# EAGLE board RCSfullschematic3 (EAGLE 7.5.0)
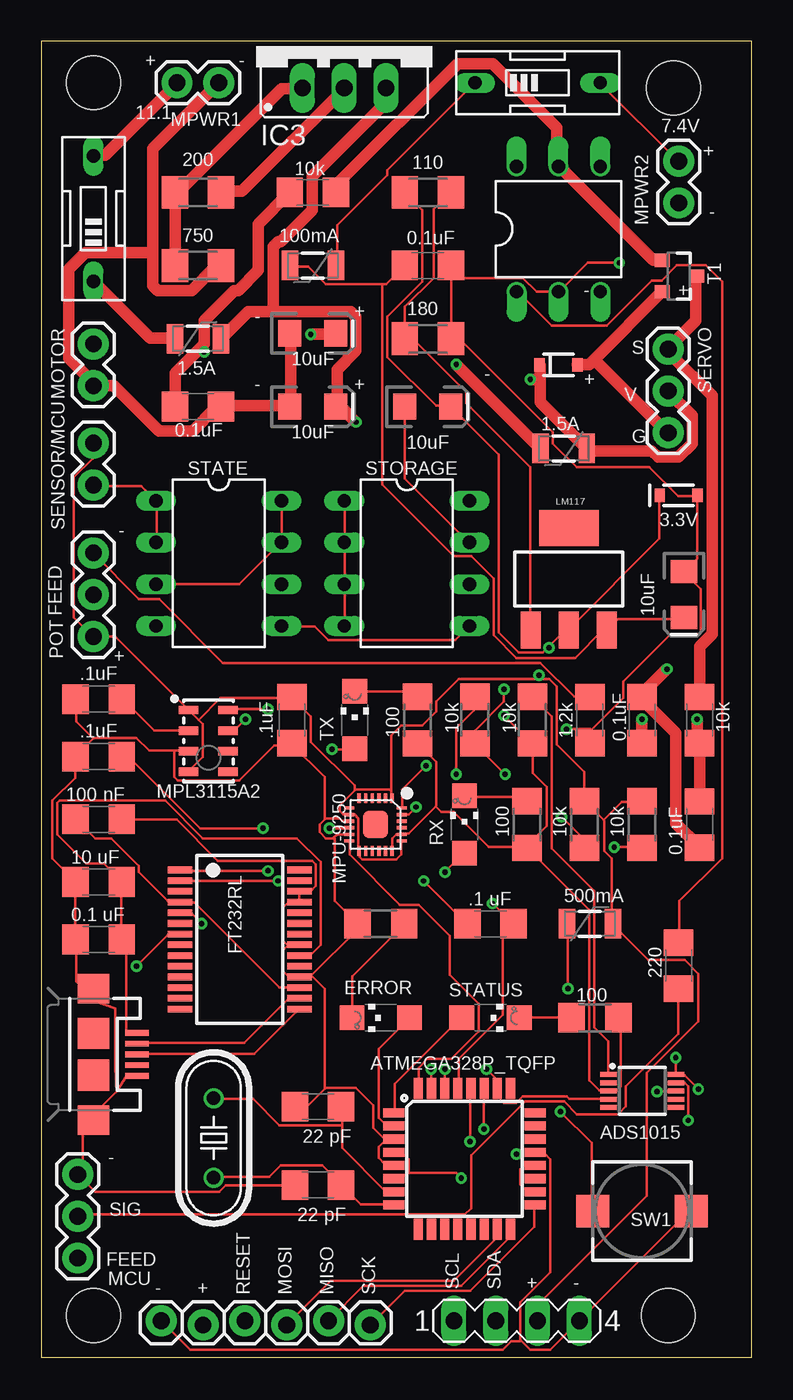
[diagram p0: board, top side]
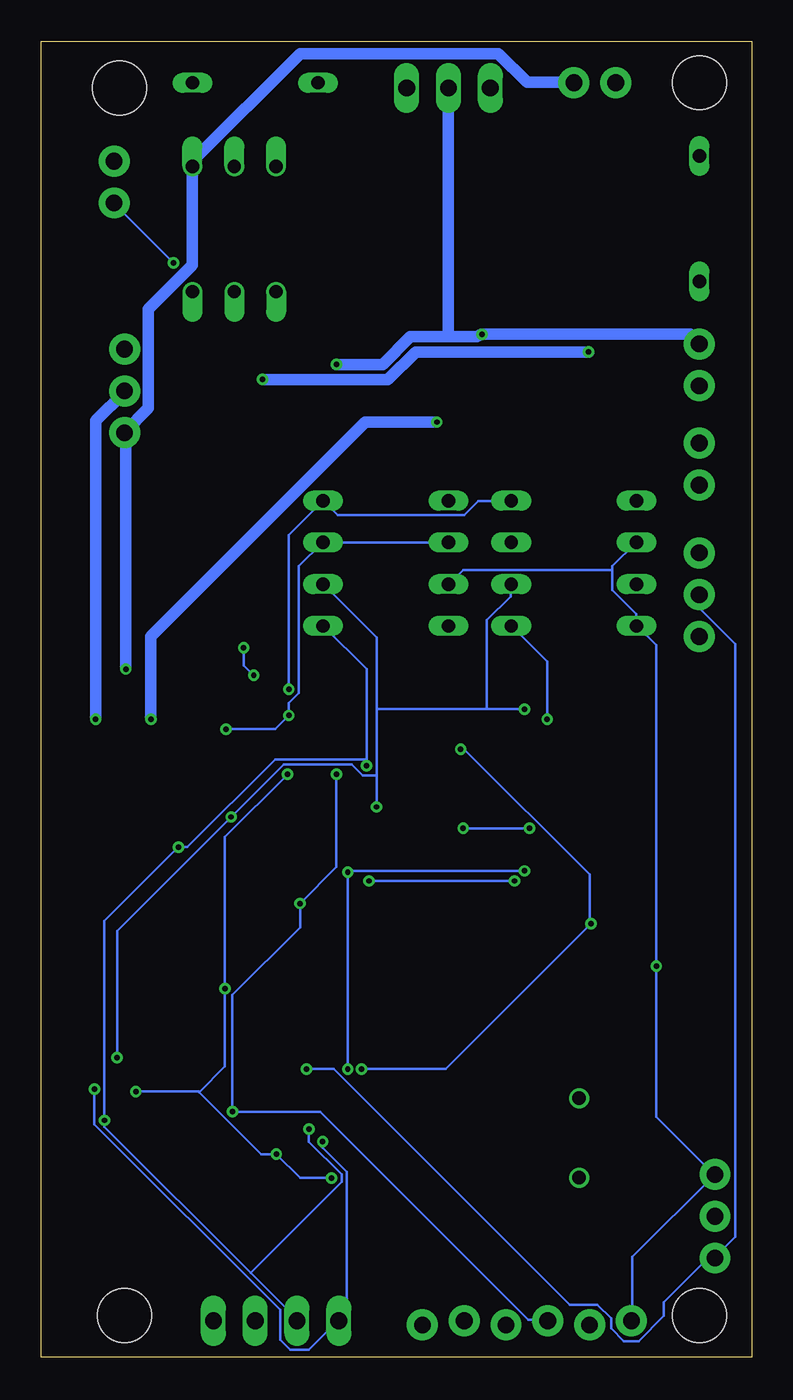
[diagram p1: board, bottom side, seen from below]

Size 43.17 x 80 mm. Coordinates in mm from the lower left corner, seen from the top.
Outline: 0,0 43.17,0 43.17,80 0,80 0,0
Copper layers (1*16): Top 0.0356mm / dielectric 1.5011mm / Bottom 0.0356mm
Design rules "LaenPCBOrder": minimum track width 6mil, minimum drill 13mil, track to track 6mil, track to pad 6mil, pad to pad 6mil, via to via 6mil, smd to smd 6mil, copper to edge 15mil, drill to drill 6mil, minimum pad ring 7mil, minimum via ring 7mil, stop-mask expansion 3mil, vias tented up to drill 0mil, thermal gap 10mil
Net classes: 1 Motor: width 0.699 mm
Holes 3.26 mm at 3.17,77.47 38.42,77.15 38.1,2.54 3.17,2.54

## Footprints (pad centres in the part's own frame; a part is rotated, then mirrored left to right if it is on the bottom)
1206 = smd 1.6 x 1.8: 1 -1.4,0; 2 1.4,0
C1206 = smd 1.6 x 1.8: 1 -1.4,0; 2 1.4,0
EIA3216 = smd 1.4 x 1.6: + 1.4,0; - -1.4,0
SOD-323@2 = smd 0.63 x 0.83: A 1.15,0; C -1.15,0
SOD-323 = smd 0.63 x 0.83: A 1.15,0; C -1.15,0
CHIPLED_1206 = smd 1.5 x 1.5: A 0,-1.75; C 0,1.75
PTC-1206 = smd 1 x 1.8: 1 -1.4,0; 2 1.4,0
SSOP28 = smd 0.4 x 1.5: 1 -4.225,-3.625; 2 -3.575,-3.625; 3 -2.925,-3.625; 4 -2.275,-3.625; 5 -1.625,-3.625; 6 -0.975,-3.625; 7 -0.325,-3.625; 8 0.325,-3.625; 9 0.975,-3.625; 10 1.625,-3.625; 11 2.275,-3.625; 12 2.925,-3.625; 13 3.575,-3.625; 14 4.225,-3.625; 15 4.225,3.625; 16 3.575,3.625; 17 2.925,3.625; 18 2.275,3.625; 19 1.625,3.625; 20 0.975,3.625; 21 0.325,3.625; 22 -0.325,3.625; 23 -0.975,3.625; 24 -1.625,3.625; 25 -2.275,3.625; 26 -2.925,3.625; 27 -3.575,3.625; 28 -4.225,3.625
317TS = drill 1.016 long: 1 -2.54,-2.54; 2 0,-2.54; 3 2.54,-2.54
MA04-1 = drill 1.016 long: 1 -3.81,0; 2 -1.27,0; 3 1.27,0; 4 3.81,0
1X06_LOCK = drill 1.016 pad 1.88: 1 0,0; 2 2.54,-0.254; 3 5.08,0; 4 7.62,-0.254; 5 10.16,0; 6 12.7,-0.254
USB-MICROB = smd 0.35 x 1.4: D+ 0,2.65; D- -0.65,2.65; GND 1.3,2.65; ID 0.65,2.65; VBUS -1.3,2.65 | smd 1.8 x 1.9: MT1 -4,0; MT2 4,0 | smd 1.9 x 1.9: P$1 -1.27,0; P$2 1.27,0
1X02 = drill 1.016 pad 1.88: 1 0,0; 2 2.54,0
SOT223 = smd 1.219 x 2.235: 1 -2.311,-3.099; 2 0,-3.099; 3 2.311,-3.099 | smd 3.6 x 2.2: 4 0,3.099
1X03 = drill 1.016 pad 1.88: 1 0,0; 2 2.54,0; 3 5.08,0
DIL06 = drill 0.813 offset: 1 -2.54,-3.81; 2 0,-3.81; 3 2.54,-3.81; 4 2.54,3.81; 5 0,3.81; 6 -2.54,3.81
HC49/S = drill 0.813: 1 -2.413,0; 2 2.413,0
R1206 = smd 1.6 x 1.803: 1 -1.422,0; 2 1.422,0
M1206 = smd 1.6 x 2: 1 -1.4,0; 2 1.4,0
DIL08 = drill 0.813 long: 1 -3.81,-3.81; 2 -1.27,-3.81; 3 1.27,-3.81; 4 3.81,-3.81; 5 3.81,3.81; 6 1.27,3.81; 7 -1.27,3.81; 8 -3.81,3.81
PUSHBUTTON_SMD_SJ = smd 2 x 2: P$1 3,0; P$2 -3,0
EDG-01 = drill 0.813 long: 1 0,-3.81; 2 0,3.81
SOT23-3 = smd 0.8 x 0.9: 1 -0.95,-1; 2 0.95,-1; 3 0,1.1
LGA-8 = smd 1.2 x 0.5: 1 -1.2,1.875; 2 -1.2,0.625; 3 -1.2,-0.625; 4 -1.2,-1.875; 5 1.2,-1.875; 6 1.2,-0.625; 7 1.2,0.625; 8 1.2,1.875
LEAD-QFN24 = smd 0.6 x 0.2: 1 -1.6,1; 2 -1.6,0.6; 3 -1.6,0.2; 4 -1.6,-0.2; 5 -1.6,-0.6; 6 -1.6,-1; 13 1.6,-1; 14 1.6,-0.6; 15 1.6,-0.2; 16 1.6,0.2; 17 1.6,0.6; 18 1.6,1 | smd 0.2 x 0.6: 7 -1,-1.6; 8 -0.6,-1.6; 9 -0.2,-1.6; 10 0.2,-1.6; 11 0.6,-1.6; 12 1,-1.6; 19 1,1.6; 20 0.6,1.6; 21 0.2,1.6; 22 -0.2,1.6; 23 -0.6,1.6; 24 -1,1.6 | smd 1.7 x 1.54: 25 0,0
TQFP32-08 = smd 1.27 x 0.559: 1 -4.293,2.8; 2 -4.293,2; 3 -4.293,1.2; 4 -4.293,0.4; 5 -4.293,-0.4; 6 -4.293,-1.2; 7 -4.293,-2; 8 -4.293,-2.8; 17 4.293,-2.8; 18 4.293,-2; 19 4.293,-1.2; 20 4.293,-0.4; 21 4.293,0.4; 22 4.293,1.2; 23 4.293,2; 24 4.293,2.8 | smd 0.559 x 1.27: 9 -2.8,-4.293; 10 -2,-4.293; 11 -1.2,-4.293; 12 -0.4,-4.293; 13 0.4,-4.293; 14 1.2,-4.293; 15 2,-4.293; 16 2.8,-4.293; 25 2.8,4.293; 26 2,4.293; 27 1.2,4.293; 28 0.4,4.293; 29 -0.4,4.293; 30 -1.2,4.293; 31 -2,4.293; 32 -2.8,4.293
MSOP10 = smd 0.3 x 1: 1 -1,-2.05; 2 -0.5,-2.05; 3 0,-2.05; 4 0.5,-2.05; 5 1,-2.05; 6 1,2.05; 7 0.5,2.05; 8 0,2.05; 9 -0.5,2.05; 10 -1,2.05

## Placement (x,y rotation side)
C1  .1uF  [1206]  3.49,40.01 180 top
C2  .1uF  [1206]  3.49,36.51 180 top
C3  .1uF  [1206]  15.24,38.73 270 top
C4  0.1uF  [1206]  40.01,32.38 270 top
C5  0.1uF  [1206]  9.53,57.78 0 top
C6  22 pF  [C1206]  16.83,10.48 0 top
C7  22 pF  [C1206]  16.83,15.24 0 top
C8  100 nF  [C1206]  3.49,32.7 180 top
C9  .1 uF  [C1206]  27.3,26.35 180 top
C10  10 uF  [C1206]  3.49,28.89 180 top
C11  0.1 uF  [C1206]  3.49,25.4 180 top
C12  0.1uF  [C1206]  23.5,66.36 0 top
C13  10uF  [EIA3216]  39.05,46.35 270 top
C14  10uF  [EIA3216]  23.5,57.78 0 top
C15  0.1uF  [C1206]  36.51,38.73 90 top
C16  10uF  [EIA3216]  16.51,57.78 0 top
C17  10uF  [EIA3216]  16.51,62.23 0 top
D1  3.3V  [SOD-323@2]  38.73,52.39 0 top
D4  BAT20JFILM  [SOD-323]  31.43,60.33 0 top
ERROR  Red  [CHIPLED_1206]  20.64,20.64 90 top
F1  1.5A  [PTC-1206]  31.75,55.24 180 top
F2  500mA  [PTC-1206]  33.34,26.35 0 top
F3  100mA  [PTC-1206]  16.51,66.36 180 top
F4  1.5A  [PTC-1206]  9.53,61.91 0 top
IC2  FT232RL  [SSOP28]  12.06,25.4 270 top
IC3  [317TS]  18.41,79.69 0 top
J1  [MA04-1]  28.89,2.22 0 top
J6  [1X06_LOCK]  7.3,2.22 0 top
J7  USB-MICROB  [USB-MICROB]  3.17,18.41 270 top
JP1  SENSOR/MCU  [1X02]  3.17,55.56 270 top
JP5  MOTOR  [1X02]  3.17,61.59 270 top
LM117  [SOT223]  32.07,47.31 0 top
MCU  [1X03]  2.22,6.03 90 top
MPWR1  11.1  [1X02]  10.79,77.47 180 top
MPWR2  7.4V  [1X02]  38.73,70.17 90 top
OK1  4N35  [DIL06]  31.43,68.58 0 top
POT  [1X03]  3.17,43.81 90 top
Q2  8 MHz  [HC49/S]  10.48,13.34 90 top
R1  220  [1206]  38.73,23.81 90 top
R2  10k  [1206]  16.51,70.8 180 top
R3  10k  [1206]  40.01,38.73 90 top
R4  1.2k  [1206]  33.34,38.73 270 top
R5  10k  [R1206]  26.35,38.73 270 top
R6  10k  [R1206]  33.02,32.38 90 top
R7  10k  [R1206]  36.51,32.38 90 top
R8  100  [R1206]  22.86,38.73 90 top
R9  100  [R1206]  29.53,32.38 90 top
R10  100  [R1206]  33.66,20.64 180 top
R11  10k  [R1206]  29.84,38.73 270 top
R12  180  [M1206]  23.5,61.91 180 top
R13  110  [M1206]  23.5,70.8 180 top
R14  200  [M1206]  9.53,70.8 0 top
R15  750  [M1206]  9.53,66.36 180 top
R16  100  [R1206]  20.64,26.35 0 top
RX  Yellow  [CHIPLED_1206]  25.72,32.38 0 top
SERVO  SMALL_SERVO  [1X03]  38.1,61.28 270 top
STATE  AT24CP  [DIL08]  10.79,48.26 270 top
STATUS  Green  [CHIPLED_1206]  27.3,20.64 270 top
STORAGE  AT24CP  [DIL08]  22.23,48.26 270 top
SW1  [PUSHBUTTON_SMD_SJ]  36.51,8.89 180 top
SW2  [EDG-01]  30.16,77.47 270 top
SW3  [EDG-01]  3.17,69.22 0 top
T1  MMBT2222A  [SOT23-3]  38.73,65.72 270 top
TX  Yellow  [CHIPLED_1206]  19.05,38.73 0 top
U1  MPL3115A2  [LGA-8]  10.16,37.47 0 top
U2  MPU-9250  [LEAD-QFN24]  20.32,32.38 270 top
U3  ATMEGA328P_TQFP  [TQFP32-08]  25.72,12.06 0 top
U4  ADS1015  [MSOP10]  36.51,16.19 270 top

## Library data of the parts
C1-C3 = SparkFun-Capacitors; PROD_ID: CAP-10057
C4 C5 R1-R4 = SparkFun-Passives
C6-C11 = eagle-ltspice; SPICEMODEL: NONE; SPICEPREFIX: C
C12 C15 R12-R15 = rcl
C13 C14 C16 C17 = SparkFun-Capacitors; PROD_ID: CAP-00811
D1 = SparkFun-DiscreteSemi; PROD_ID: DIO-08199
D4 = SparkFun-DiscreteSemi; PROD_ID: DIO-11623
ERROR R5-R11 R16 RX STATUS SW1 TX = adafruit
F1-F4 = SparkFun-PowerIC; PROD_ID: RES-11150
IC2 = ftdichip; MPN: FT232RL; OC_FARNELL: 1146032; OC_NEWARK: 91K9918
IC3 = v-reg
J1 = con-lstb; OC_FARNELL: unknown; OC_NEWARK: unknown
J6 JP1 JP5 MCU MPWR1 MPWR2 POT = SparkFun-Connectors
J7 = SparkFun-Connectors; PROD_ID: CONN-09505
LM117 = SparkFun-IC-Power; PROD_ID: VREG-08170
OK1 = optocoupler; MF: FAIRCHILD SEMICONDUCTOR; MPN: 4N35; OC_FARNELL: 1328375; OC_NEWARK: 72K9946
Q2 = adafruit; OC_FARNELL: 1667008; OC_NEWARK: unknown
SERVO = SparkFun-Electromechanical
STATE STORAGE = atmel; MPN: AT24C1024BW-SH-B; OC_FARNELL: 1362646; OC_NEWARK: 03P2044
SW2 SW3 = special
T1 = SparkFun-DiscreteSemi; PROD_ID: TRANS-08049
U1 = SparkFun-Sensors; PROD_ID: IC-10869
U2 = invensense copy
U3 = SparkFun-DigitalIC; PROD_ID: IC-09069
U4 = SparkFun-AnalogIC; PROD_ID: IC-12239

## Nets
6V_POWER [Motor]: C4.1 C5.1 D4.C F1.1 R2.2 R3.1 SERVO.2
A4(SDA): J1.2 R7.1 STATE.5 STORAGE.5 U1.7 U2.24 U3.27 U4.9
A5(SCL): J1.1 R6.1 STATE.6 STORAGE.6 U1.8 U2.23 U3.28 U4.10
CS: U2.22
DM: IC2.16 J7.D-
DP: IC2.15 J7.D+
DTR: C9.2 IC2.2
FEEDBACK: MCU.1 POT.2 U3.26 U4.4
GND: C1.2 C2.2 C3.2 C6.1 C7.1 C8.1 C10.2 C11.2 C12.2 C13.- C14.- D1.A IC2.7 IC2.18 IC2.21 IC2.25 IC2.26 J1.4 J6.1 J7.GND J7.MT1 J7.MT2 JP1.2 MCU.3 MPWR2.1 OK1.2 R4.2 R8.1 R9.1 R10.1 R11.2 R12.1 R16.1 STATE.1 STATE.2 STATE.4 STORAGE.1 STORAGE.2 STORAGE.3 STORAGE.4 STORAGE.7 SW1.P$2 U1.3 U2.9 U2.11 U2.18 U2.20 U3.3 U3.5 U3.21 U4.3
GND1 [Motor]: C4.2 C5.2 C15.2 C16.- C17.- D4.A JP5.2 MPWR1.1 OK1.4 R15.1 SERVO.3 T1.2
INT: U2.12 U3.32
INT1: U1.6
INT2: U1.5
LOGIC_VDD: C3.1 C14.+ D1.C F2.2 J1.3 JP1.1 LM117.2 POT.1 R6.2 R7.2 R13.2 U1.1 U1.4 U2.1 U2.8 U2.13 U2.19
MISO: J6.5 U3.16
MOSI: J6.4 U3.15
MOTOR: MCU.2 R1.1 U3.13
N$1: C1.1 U1.2
N$2 [Motor]: OK1.5 R2.1 T1.1
N$3: C2.1 U2.10
N$5: POT.3 R4.1
N$6: R11.1 U4.1
N$7: OK1.1 R1.2
N$8: C7.2 Q2.2 U3.7
N$9: C6.2 Q2.1 U3.8
N$10: R8.2 TX.C
N$11: R9.2 RX.C
N$12: STATUS.A U3.1
N$13: R10.2 STATUS.C
N$14: ERROR.C R16.2
N$15: LM117.1 R12.2 R13.1
N$16: MPWR2.2 SW2.2
N$17: C12.1 C13.+ F3.2 LM117.3
N$18: F3.1 SW2.1
N$19 [Motor]: MPWR1.2 SW3.2
N$20 [Motor]: F4.1 SW3.1
N$21 [Motor]: C15.1 C16.+ F4.2 IC3.3
N$22 [Motor]: IC3.1 R14.1 R15.2
N$23: ERROR.A U3.2
RESET: C9.1 J6.3 R5.1 SW1.P$1 U3.29
RX: IC2.1 RX.A U3.30
SCK: J6.6 U3.17
SIGNAL [Motor]: R3.2 SERVO.1 T1.3
TX: IC2.5 TX.A U3.31
USBVDD: C10.1 C11.1 IC2.20 J7.VBUS
VCC: F2.1 R5.2 STATE.3 STATE.7 STATE.8 STORAGE.8 U3.4 U3.6 U3.18 U3.20 U4.8
VDD: J6.2
VDD_IO: C8.2 IC2.4 IC2.17
VOUT-MOTOR [Motor]: C17.+ F1.2 IC3.2 JP5.1 R14.2

## Tracks (layer width: path | path; a pad name or v marks a point on that pad's centre or on a via)
6V_POWER  (via drill 0.33)
  Top 0.699: 9.68,61.34 9.91,61.57 9.91,63.02 11.73,64.85 11.96,64.85 13.18,66.06 13.18,68.89 15.09,70.79 R2.2 | 9.68,61.34 8.15,59.82 8.15,57.84 C5.1 | 30.33,59.44 30.33,58.06 F1.1 33.45,55.09 37.11,55.09 37.49,54.71 38.71,54.71 39.55,55.55 39.55,57.23 38.1,58.67 SERVO.2 | 30.33,59.44 30.33,60.27 D4.C | C4.1 R3.1 39.85,37.64 v39.85,38.79 | v9.91,61.11 9.68,61.34 | v29.72,59.44 30.33,59.44
  Bottom 0.699: v39.85,38.79 39.85,56.92 38.1,58.67 SERVO.2 | v9.91,61.11 20.42,61.11 22.1,59.44 v29.72,59.44
A4(SDA)  (via drill 0.33)
  Top 0.152: v39.32,14.4 39.32,16.46 39.09,16.69 38.63,16.69 U4.9 | v26.9,13.87 26.9,16.31 U3.27 | v12.42,38.79 11.73,38.1 11.43,38.1 U1.7 | v23.39,35.97 21.95,34.52 21.95,33.45 U2.24 | v34.82,31.01 36.5,31.01 R7.1 | STATE.5 14.63,44.42 16.61,44.42 17.45,43.59 25.15,43.59 25.98,44.42 STORAGE.5
  Bottom 0.152: 30.44,5.14 27.58,2.29 J1.2 | 30.44,5.14 39.32,14.02 v39.32,14.4 39.32,26.52 v34.82,31.01 34.29,31.01 28.96,36.35 23.39,36.35 | v26.9,13.87 26.9,13.11 24.92,11.12 24.92,10.67 30.44,5.14 | v12.42,38.79 12.42,42.29 14.55,44.42 STATE.5 | 23.39,36.35 23.39,41.83 25.98,44.42 STORAGE.5 | 23.39,36.35 v23.39,35.97
A5(SCL)  (via drill 0.33)
  Top 0.152: v39.93,16.31 39.09,17.14 38.63,17.14 U4.10 38.56,17.22 v38.56,18.21 | v26.06,13.11 26.06,16.31 U3.28 | v22.78,33.45 22.33,32.99 21.95,32.99 U2.23 | v13.79,39.4 11.43,39.4 U1.8 | v31.62,32.84 32.99,31.47 32.99,31.01 R6.1
  Bottom 0.152: v39.93,16.31 39.93,14.17 28.65,2.9 28.65,1.07 28.04,0.46 26.9,0.46 25.15,2.21 J1.1 25.07,2.29 24.61,2.74 24.61,11.28 26.06,12.72 v26.06,13.11 | 22.78,39.4 22.78,43.74 STORAGE.6 | 22.78,39.4 22.78,35.36 | 22.78,35.36 v22.78,33.45 | 22.78,39.4 16.08,39.4 | 16.08,39.4 v13.79,39.4 | 22.78,35.36 23.62,35.36 24.31,36.04 28.42,36.04 v31.62,32.84 38.56,25.91 v38.56,18.21 | 16.08,39.4 16.08,44.81 14.63,46.25 14.63,46.94 STATE.6
DM
  Top 0.152: J7.D- 5.26,19.13 12.34,19.13 15.01,21.79 15.62,21.79 IC2.16
DP
  Top 0.152: J7.D+ 5.26,18.44 12.95,18.44 15.62,21.11 IC2.15
DTR  (via drill 0.33)
  Top 0.152: v14.4,28.96 8.46,28.96 IC2.2 | v23.24,28.96 25.83,26.36 C9.2
  Bottom 0.152: v23.24,28.96 v14.4,28.96
FEEDBACK  (via drill 0.33)
  Top 0.152: U4.4 34.44,15.7 32.08,15.7 31.93,15.85 29.26,15.85 28.88,15.47 28.12,15.47 27.74,15.85 27.74,16.31 U3.26 27.66,16.38 27.66,16.92 v27.05,17.53
  Bottom 0.152: v27.05,17.53 25.38,17.53 11.05,3.2 9.37,3.2 8.53,2.36 8.53,1.75 7.77,0.99 6.86,0.99 5.33,2.52 5.33,3.35 2.67,6.02 2.29,6.02 MCU.1 2.21,6.1 0.99,7.32 0.99,43.36 3.12,45.49 3.12,46.33 POT.2
GND  (via drill 0.33)
  Top 0.152: U3.5 21.41,11.73 20.88,11.73 20.5,12.12 20.5,12.8 20.95,13.26 U3.3 20.88,13.26 20.19,13.95 20.19,15.32 19.13,16.38 17.3,16.38 17.26,16.34 | C7.1 16.15,15.24 17.26,16.34 | 17.79,31.59 17.75,31.55 17.3,31.55 16.92,31.93 16.92,32.38 17.26,32.73 | 17.79,31.59 17.98,31.77 18.67,31.77 U2.11 | 17.26,32.73 17.3,32.77 18.14,32.77 18.29,32.61 18.67,32.61 U2.9 | 17.26,32.73 17.22,32.77 17.22,35.28 15.24,37.26 C3.2 15.24,37.19 14.17,37.19 12.04,35.05 8.31,35.05 8.08,35.28 8.08,36.88 | 14.97,25.03 15.01,25.07 15.62,25.07 IC2.21 | 14.97,25.03 14.71,24.77 14.71,23.47 15.01,23.16 15.62,23.16 IC2.18 15.7,23.16 16.38,23.16 16.42,23.2 | 14.97,25.03 14.71,25.3 14.71,27.36 15.01,27.66 15.62,27.66 IC2.25 15.7,27.74 15.7,28.27 IC2.26 15.77,28.27 16.31,28.27 16.69,28.65 16.69,29.95 16.46,30.18 10.74,30.18 8.23,32.69 4.95,32.69 C8.1 | 16.42,23.2 19.2,25.98 19.2,26.29 R16.1 19.2,26.36 17.83,27.74 17.83,31.55 17.79,31.59 | 16.42,23.2 17.22,22.4 17.22,16.38 17.26,16.34 | 29.15,1.03 29.72,0.46 30.94,0.46 J1.4 39.32,8.84 39.47,8.84 SW1.P$2 | 29.15,1.03 29.11,1.07 29.11,3.35 30.94,5.18 30.94,12.04 30.56,12.42 30.02,12.42 U3.21 | 8.08,36.88 6.55,36.88 5.79,37.64 3.2,37.64 3.16,37.6 | 8.08,36.88 8.91,36.88 U1.3 | 3.16,37.6 2.13,36.58 C2.2 2.06,36.5 2.06,35.2 0.69,33.83 0.69,30.33 2.06,28.96 C10.2 2.06,28.88 2.06,25.45 C11.2 2.13,25.38 2.13,22.86 2.52,22.48 J7.MT1 2.59,22.4 2.59,21.87 4.51,21.22 4.51,17.53 4.6,16.17 | 3.16,37.6 2.13,38.63 2.13,40.01 C1.2 | 4.6,16.17 2.27,13.84 J7.MT2 2.52,14.4 2.52,11.35 2.29,11.12 MCU.3 3.28,10.06 10.82,10.06 11.2,10.44 15.39,10.44 C6.1
  Top 0.152: 4.6,16.17 5.18,17.07 J7.GND | v5.79,23.77 7.7,25.68 8.38,25.68 IC2.7 | J6.1 9.07,0.46 28.04,0.46 28.57,0.99 29.11,0.99 29.15,1.03 | 33.41,38.14 35.36,40.08 35.36,41.07 38.25,43.97 39.93,43.97 40.08,44.12 40.08,46.71 39.09,47.7 C13.- 39.09,47.78 39.85,48.54 39.85,52.35 D1.A 39.78,52.35 38.71,52.35 36.96,54.1 32.54,54.1 31.09,55.55 31.09,56.24 25.38,61.95 24.99,61.95 R12.1 24.92,61.95 24.92,65.61 | 33.41,38.14 33.38,38.1 33.38,37.34 R4.2 | 24.92,65.61 24.92,66.29 C12.2 24.92,65.61 | 24.92,65.61 29.26,65.61 30.1,64.77 OK1.2 31.47,64.77 33.22,66.52 v35.13,66.52 | R10.1 35.13,20.57 35.2,20.5 35.2,16.46 34.98,16.23 34.52,16.23 U4.3 34.44,16.23 33.91,16.23 33.3,16.84 33.3,27.2 29.57,30.94 R9.1 | U2.18 21.34,30.86 21.34,31.55 21.57,31.77 21.87,31.77 U2.20 21.95,31.85 22.33,31.85 23.96,33.49 | 23.96,33.49 24,33.53 24,36.2 22.86,37.34 R8.1 | 23.96,33.49 24.31,33.15 25.07,33.15 27.2,31.01 29.49,31.01 R9.1 | R9.1 29.49,31.09 30.71,32.31 30.71,34.67 29.87,35.51 29.87,37.26 R11.2 29.79,37.34 v28.12,39.01 | STATE.2 7.01,49.53 7.01,52.05 STATE.1 6.1,52.96 3.2,52.96 JP1.2 | STORAGE.4 18.44,44.5 18.44,46.94 STORAGE.3 18.44,47.02 18.44,49.53 | 18.44,49.53 18.44,52.05 STORAGE.1 | 18.44,49.53 STORAGE.2 | C14.- 22.1,57.76 22.1,53.42 25.98,49.53 STORAGE.7 | v31.93,38.18 33.38,38.18 33.41,38.14
  Bottom 0.152: J6.1 7.24,2.29 7.24,6.1 MCU.3 2.29,11.12 5.79,14.63 v5.79,23.77 5.79,43.28 6.93,44.42 STATE.4 7.01,44.5 7.01,45.19 8.46,46.63 8.46,47.85 | v35.13,66.52 38.71,70.1 MPWR2.1 | 8.46,47.85 8.46,48.08 7.01,49.53 STATE.2 | STORAGE.2 STORAGE.7 26.06,49.53 27.51,48.08 27.51,40.39 28.12,39.78 v28.12,39.01 28.96,38.18 v31.93,38.18 | 8.46,47.85 17.53,47.85 18.36,47.02 STORAGE.3
GND1  (via drill 0.33)
  Top 0.699: 6.78,67.13 6.78,73.46 MPWR1.1 | 6.78,67.13 6.78,65.15 7.09,64.85 9.14,64.85 10.59,66.29 10.9,66.29 R15.1 | C17.- 15.16,62.18 15.16,58.14 C16.- 15.09,57.84 10.97,57.84 C5.2 10.59,57.68 9.22,56.31 7.16,56.31 4.42,59.05 JP5.2 3.05,59.36 1.68,60.73 1.68,66.14 2.67,67.13 6.78,67.13 | C4.2 40.01,31.01 38.56,32.46 38.56,37.95 36.58,39.93 36.58,40.08 C15.2 36.65,40.46 v38.02,41.83 | 33.6,60.66 T1.2 | 33.6,60.66 33.3,60.35 32.61,60.35 D4.A | 33.6,60.66 38.1,56.16 SERVO.3
  Bottom 0.699: v38.02,41.83 38.02,55.85 SERVO.3 38.1,56.24 36.65,57.68 36.65,63.7 33.98,66.37 33.98,72.39 OK1.4 33.98,72.69 27.43,79.25 15.39,79.25 13.64,77.5 10.82,77.5 MPWR1.1
INT
  Top 0.152: U2.12 18.75,31.32 18.75,30.56 21.79,27.51 22.94,27.51 24.84,25.6 24.84,23.24 26.59,21.49 26.59,19.81 24.92,18.14 23.47,18.14 22.94,17.6 22.94,16.38 U3.32
LOGIC_VDD  (via drill 0.33)
  Top 0.152: D1.C 37.57,52.35 37.57,49.76 32.08,44.27 LM117.2 32,44.2 31.85,44.2 30.82,43.17 | R13.2 23.16,69.72 23.16,65.38 21.03,63.25 21.03,60.81 24,57.84 24.84,57.84 C14.+ 24.92,57.76 27.81,54.86 27.81,44.04 29.03,42.82 30.48,42.82 30.82,43.17 | 34.18,32.65 33.07,33.76 R6.2 32.99,33.83 32.99,35.59 31.32,37.26 31.32,40.77 30.86,41.22 30.25,41.22 | 34.18,32.65 34.21,32.61 34.21,30.79 34.67,30.33 34.67,26.36 F2.2 34.75,26.29 36.88,24.16 39.09,24.16 39.93,23.32 39.93,20.42 36.8,17.3 36.8,9.83 30.18,3.2 30.18,2.29 J1.3 | 34.18,32.65 35.28,33.76 36.5,33.76 R7.2 | 21.22,34.48 21.18,34.52 19.13,34.52 19.09,34.48 | 21.22,34.48 21.26,34.44 21.26,33.98 U2.1 | 19.09,34.48 18.14,33.53 18.14,33.22 18.36,32.99 18.67,32.99 U2.8 18.75,32.99 19.05,32.99 19.28,32.77 19.28,30.86 U2.13 19.36,30.79 19.36,30.4 19.51,30.25 21.57,30.25 21.87,30.56 21.87,31.32 U2.19 | 9.56,38.75 8.99,39.32 U1.1 8.91,39.4 4.5,43.81 POT.1 3.12,43.81 1.98,44.96 1.98,53.49 3.12,54.63 3.12,55.55 JP1.1 | 9.56,38.75 9.83,38.48 9.83,36.5 8.99,35.66 U1.4 | 15.24,40.08 10.9,40.08 9.56,38.75 | 15.24,40.08 16.38,38.94 16.38,37.41 19.05,34.75 19.05,34.52 19.09,34.48 | 15.24,40.08 C3.1 | 30.25,41.22 25.38,41.22 24,39.85 24,39.24 23.16,38.41 21.87,38.41 21.26,37.8 21.26,34.52 21.22,34.48 | 30.25,41.22 v30.25,41.45 | v30.86,43.13 30.82,43.17
  Bottom 0.152: v30.86,43.13 30.86,42.06 v30.25,41.45
MISO
  Top 0.152: J6.5 19.58,4.34 25.53,4.34 28.5,7.32 28.5,7.77 U3.16
MOSI
  Top 0.152: J6.4 17.6,4.65 25.07,4.65 27.66,7.24 27.66,7.77 U3.15
MOTOR
  Top 0.152: 25.72,8.65 25.68,8.69 2.36,8.69 2.29,8.61 MCU.2 | 25.72,8.65 26.06,8.31 26.06,7.77 U3.13 | 25.72,8.65 26.14,9.07 26.14,12.27 29.41,15.54 31.77,15.54 32.54,14.78 35.05,14.78 35.51,15.24 35.51,16.46 38.71,19.66 38.71,22.4 R1.1
N$1
  Top 0.152: U1.2 8.91,38.1 6.86,38.1 4.95,40.01 C1.1
N$2
  Top 0.699: T1.1 37.19,66.67 31.47,72.39 OK1.5 31.32,72.69 31.32,74.75 27.43,78.64 25.3,78.64 17.98,71.32 17.98,70.87 R2.1
N$3  (via drill 0.33)
  Top 0.152: v17.53,32.16 18.67,32.16 U2.10 | v13.49,32.16 9.68,32.16 5.33,36.5 4.95,36.5 C2.1
  Bottom 0.152: v13.49,32.16 v17.53,32.16
N$5
  Top 0.152: R4.1 33.3,40.16 32.38,40.16 30.33,42.22 11.05,42.22 7.16,46.1 5.94,46.1 3.2,48.84 POT.3
N$6
  Top 0.152: U4.1 34.44,17.22 34.44,19.2 33.6,20.04 33.6,28.35 31.01,30.94 31.01,38.94 29.87,40.08 R11.1
N$7
  Top 0.152: R1.2 38.79,25.22 38.79,27.74 41.38,30.33 41.38,65.38 40.39,66.37 38.63,66.37 37.72,65.46 37.11,65.46 34.37,62.71 31.01,62.71 28.96,64.77 OK1.1
N$8
  Top 0.152: 18.29,14.1 18.29,15.24 C7.2 | 18.29,14.1 18.29,12.72 20.88,10.13 21.41,10.13 U3.7 | 18.29,14.1 14.48,14.1 12.88,15.7 10.52,15.7 Q2.2
N$9
  Top 0.152: U3.8 21.41,9.3 19.43,9.3 18.29,10.44 C6.2 18.21,10.52 17.07,11.66 14.55,11.66 13.87,10.97 10.52,10.97 Q2.1
N$10
  Top 0.152: R8.2 22.55,40.46 19.05,40.46 TX.C | R8.2
N$11
  Top 0.152: RX.C 25.76,34.06 29.26,34.06 29.49,33.83 R9.2
N$12
  Top 0.152: U3.1 21.49,14.94 21.49,16.61 25.53,20.65 STATUS.A
N$13
  Top 0.152: STATUS.C 29.11,20.65 R10.2
N$14
  Top 0.152: ERROR.C 18.9,23.16 22.02,26.29 R16.2
N$15
  Top 0.152: R13.1 24.84,70.79 23.85,69.8 23.85,65.61 22.1,63.86 22.1,61.95 R12.2 22.17,61.95 22.55,61.95 25.83,58.67 25.83,57.99 29.72,54.1 29.72,44.27 LM117.1
N$16
  Top 0.152: SW2.2 33.98,77.42 38.71,72.69 MPWR2.2
N$17
  Top 0.152: C13.+ 39.01,44.88 35.05,44.88 LM117.3 34.37,44.2 34.14,44.2 32.46,42.52 28.88,42.52 27.51,43.89 27.51,47.32 26.14,48.69 25.07,48.69 20.73,53.03 20.73,65.23 | 20.73,65.23 20.95,65.23 22.02,66.29 C12.1 | 20.73,65.23 17.3,65.23 16.23,66.29 15.16,66.29 F3.2
N$18
  Top 0.152: F3.1 17.98,66.37 17.98,68.81 21.03,71.86 21.03,72.16 26.29,77.42 SW2.1
N$19
  Top 0.699: SW3.2 3.2,73.08 3.89,73.08 8.23,77.42 MPWR1.2
N$20
  Top 0.699: SW3.1 6.63,61.95 8.08,61.95 F4.1
N$21  (via drill 0.33)
  Top 0.699: 14.1,63.55 12.57,63.55 10.97,61.95 F4.2 | 14.1,63.55 18.82,63.55 19.13,63.25 19.13,61.19 17.98,60.05 17.98,57.84 C16.+ 18.29,57.68 v19.13,56.84 | v36.5,38.79 C15.1 | IC3.3 20.95,76.28 16.46,71.78 16.46,69.72 14.55,67.82 14.4,67.82 14.1,67.51 14.1,63.55
  Bottom 0.699: v36.5,38.79 36.5,43.81 23.47,56.84 v19.13,56.84
N$22
  Top 0.699: R15.2 8.15,66.37 8.15,70.79 R14.1 8.46,70.94 14.63,77.11 15.85,77.11 IC3.1
N$23
  Top 0.152: U3.2 21.41,14.1 20.95,14.1 20.5,14.55 20.5,18.75 22.33,20.57 ERROR.A
RESET  (via drill 0.33)
  Top 0.152: U3.29 25.38,16.38 25.38,18.14 28.04,20.8 28.04,25.68 28.65,26.29 C9.1 28.65,26.36 v27.43,27.58 | v25.22,35.43 25.22,38.25 26.29,39.32 26.29,40.08 R5.1 | v31.55,14.94 33.45,13.03 33.45,8.91 SW1.P$1
  Bottom 0.152: v25.22,35.43 25.22,29.79 v27.43,27.58 27.43,26.14 31.55,22.02 v31.55,14.94 26.21,14.94 13.56,2.29 12.42,2.29 J6.3
RX  (via drill 0.33)
  Top 0.152: v24.54,17.53 24.54,16.38 U3.30 | v24.54,29.49 25.68,30.63 RX.A | v13.79,29.57 8.46,29.57 IC2.1
  Bottom 0.152: v24.54,17.53 v24.54,29.49 24.46,29.57 v13.79,29.57
SCK
  Top 0.152: U3.17 29.95,9.22 29.95,7.92 26.06,4.04 22.1,4.04 20.04,1.98 J6.6
SIGNAL
  Top 0.699: T1.3 39.78,65.68 39.78,63.02 38.1,61.34 SERVO.1 38.25,60.96 40.77,58.45 40.77,43.97 40.01,43.2 R3.2
TX  (via drill 0.33)
  Top 0.152: v23.7,17.53 23.7,16.38 U3.31 | v9.75,26.36 9.14,26.98 8.46,26.98 IC2.5 | v17.68,36.96 19.05,36.96 TX.A
  Bottom 0.152: v23.7,17.53 18.59,17.53 v9.75,26.36 9.83,26.36 9.83,29.34 17.45,36.96 v17.68,36.96
USBVDD
  Top 0.152: J7.VBUS 5.18,19.74 5.18,25.15 4.95,25.38 C11.1 4.88,25.45 4.88,28.88 C10.1 4.88,28.96 3.81,30.02 2.74,30.02 0.99,31.77 0.99,33.68 1.14,33.83 7.54,33.83 9.83,31.55 15.54,31.55 16.99,30.1 16.99,25.07 16.38,24.46 15.7,24.46 IC2.20
VCC  (via drill 0.33)
  Top 0.152: 22.29,11.24 22.33,11.28 22.33,12.04 21.95,12.42 21.49,12.42 U3.4 | 22.29,11.24 21.95,10.9 21.49,10.9 U3.6 | v37.41,16.15 38.56,16.15 U4.8 | v28.88,12.34 29.49,11.73 29.95,11.73 U3.20 29.41,11.73 29.11,11.43 29.11,10.52 29.49,10.13 29.95,10.13 U3.18 | v32,22.4 32,26.29 F2.1 | v25.53,10.9 25.22,11.2 22.33,11.2 22.29,11.24 | STATE.3 7.01,47.02 12.04,47.02 14.55,49.53 STATE.7 14.63,49.53 14.63,52.05 STATE.8 | v28.12,40.62 28.12,39.85 26.36,38.1 26.36,37.34 R5.2 26.36,37.26 v28.19,35.43
  Bottom 0.152: v37.41,16.15 33.6,16.15 33.57,16.12 | 33.57,16.12 29.79,12.34 v28.88,12.34 27.43,10.9 v25.53,10.9 | 33.57,16.12 32,17.68 v32,22.4 32,31.62 v28.19,35.43 | v28.12,40.62 28.12,49.99 STORAGE.8 25.98,52.05 25.15,51.21 17.45,51.21 16.61,52.05 14.63,52.05 STATE.8
VDD_IO
  Top 0.152: C8.2 2.13,32.69 3.28,31.55 4.27,31.55 5.94,29.87 5.94,29.49 7.7,27.74 8.38,27.74 IC2.4 8.46,27.66 9.3,27.66 14.48,22.48 15.62,22.48 IC2.17
VOUT-MOTOR  (via drill 0.33)
  Top 0.699: R14.2 10.97,70.87 12.19,70.87 18.44,77.11 IC3.2 | v16.38,62.18 17.91,62.18 C17.+ | v25.22,60.35 30.33,55.24 F1.2
  Bottom 0.699: JP5.1 3.2,61.65 3.73,62.18 v16.38,62.18 16.69,62.03 18.44,62.03 | v25.22,60.35 22.4,60.35 20.73,62.03 18.44,62.03 | 18.44,62.03 18.44,77.11 IC3.2

## Text on the board
tNames: + | - | + | - | - | + | - | + | S | - | + | - | + | V | G | - | FEED | + | - | SIG | FEED | - | + | RESET | MOSI | MISO | SCK | SCL | SDA | + | -